# Altium PCB PCB1.PcbDoc
Units mil, origin at the board's own origin, x right, y up, seen from the top; angles counter-clockwise.
Board outline 5120 x 3010 mil, 2 copper layers (Top Layer, Bottom Layer); 50 components, 66 nets, 204 pads, 0 vias.
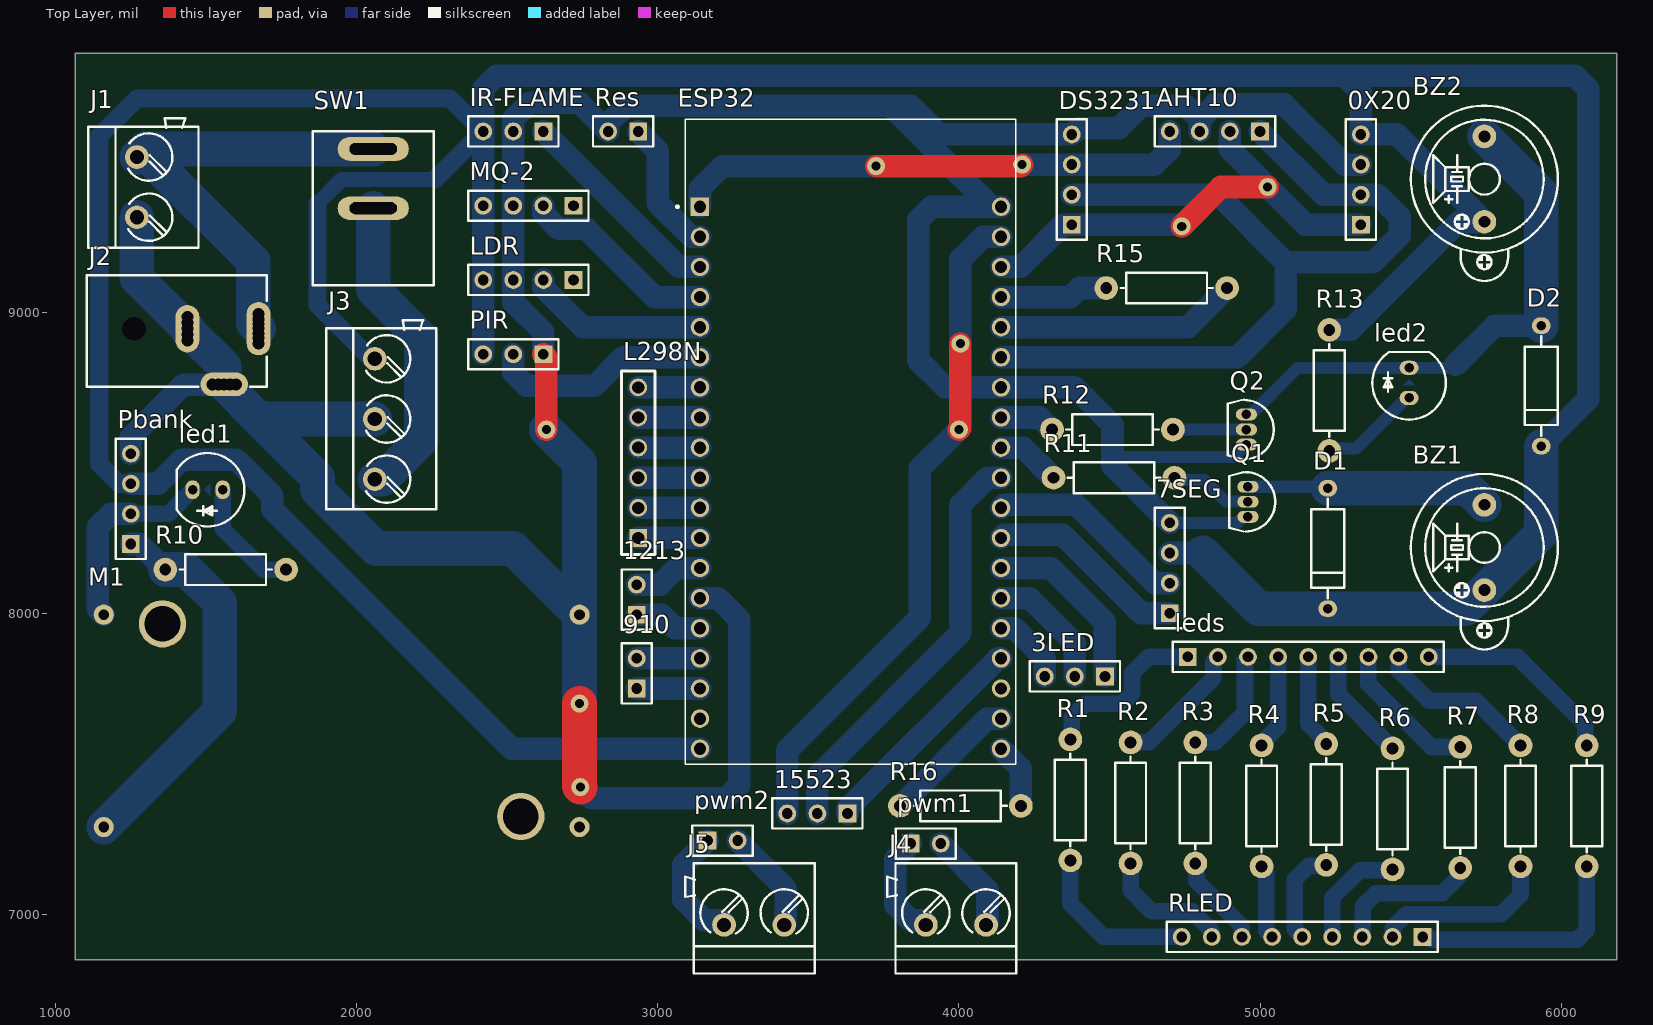
[diagram p0: Top Layer view]
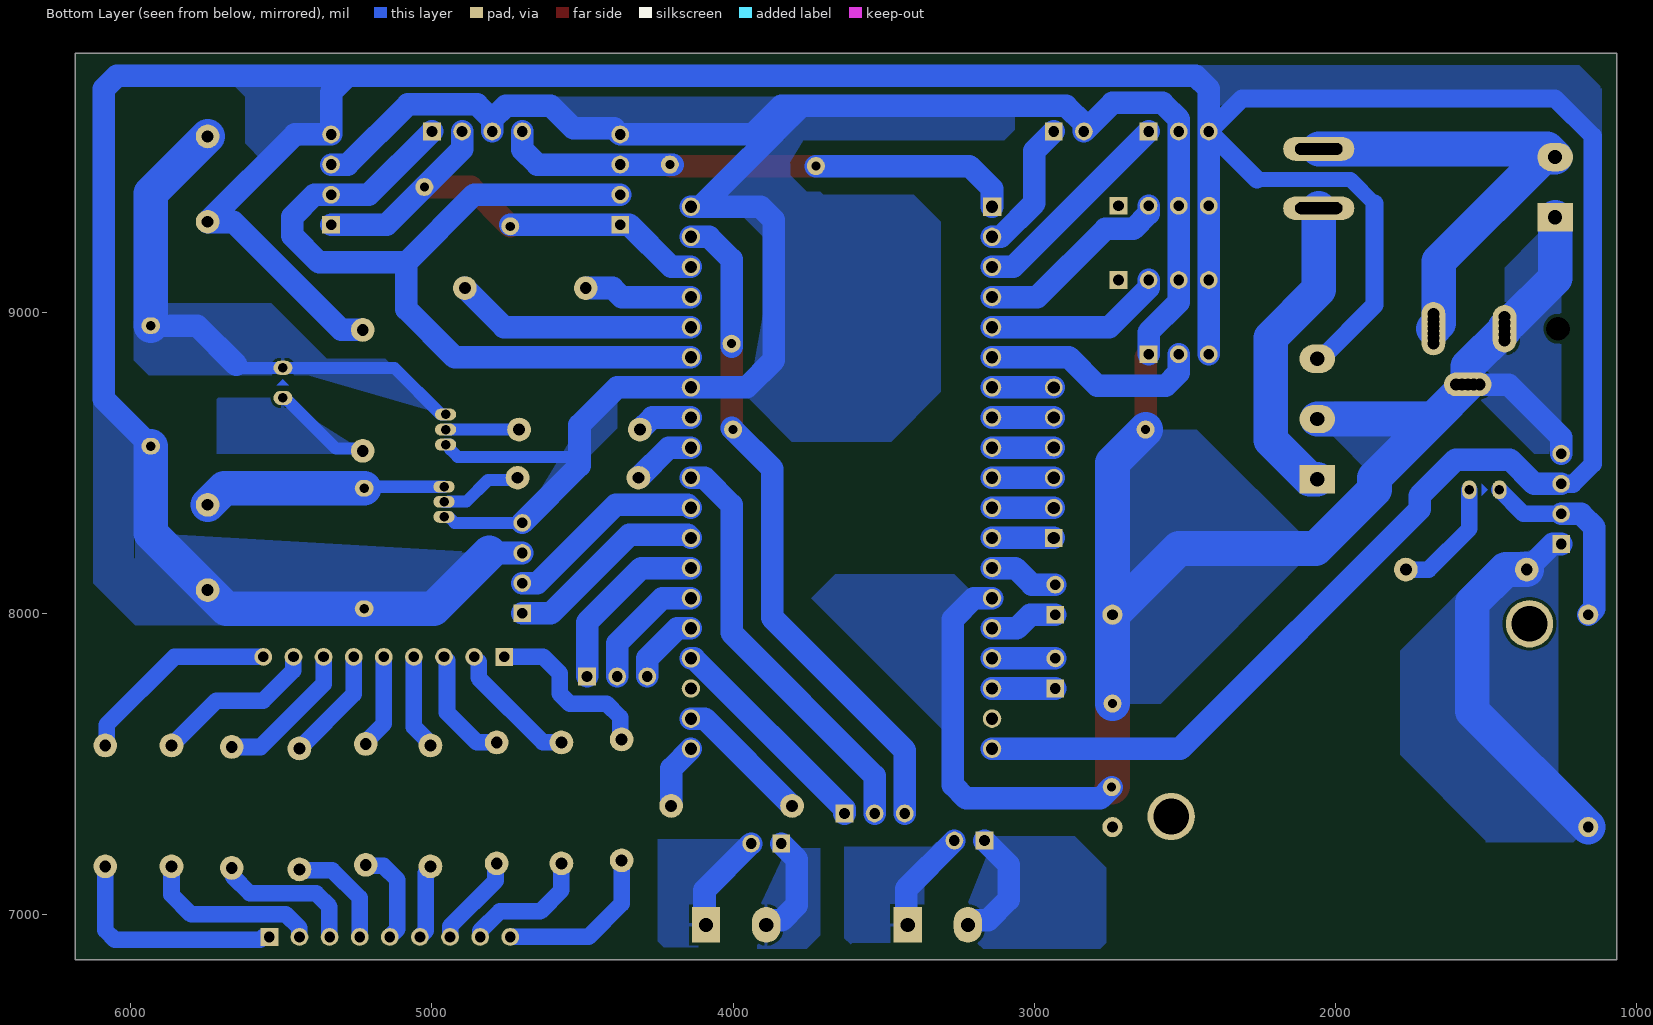
[diagram p1: Bottom Layer view, seen from below]
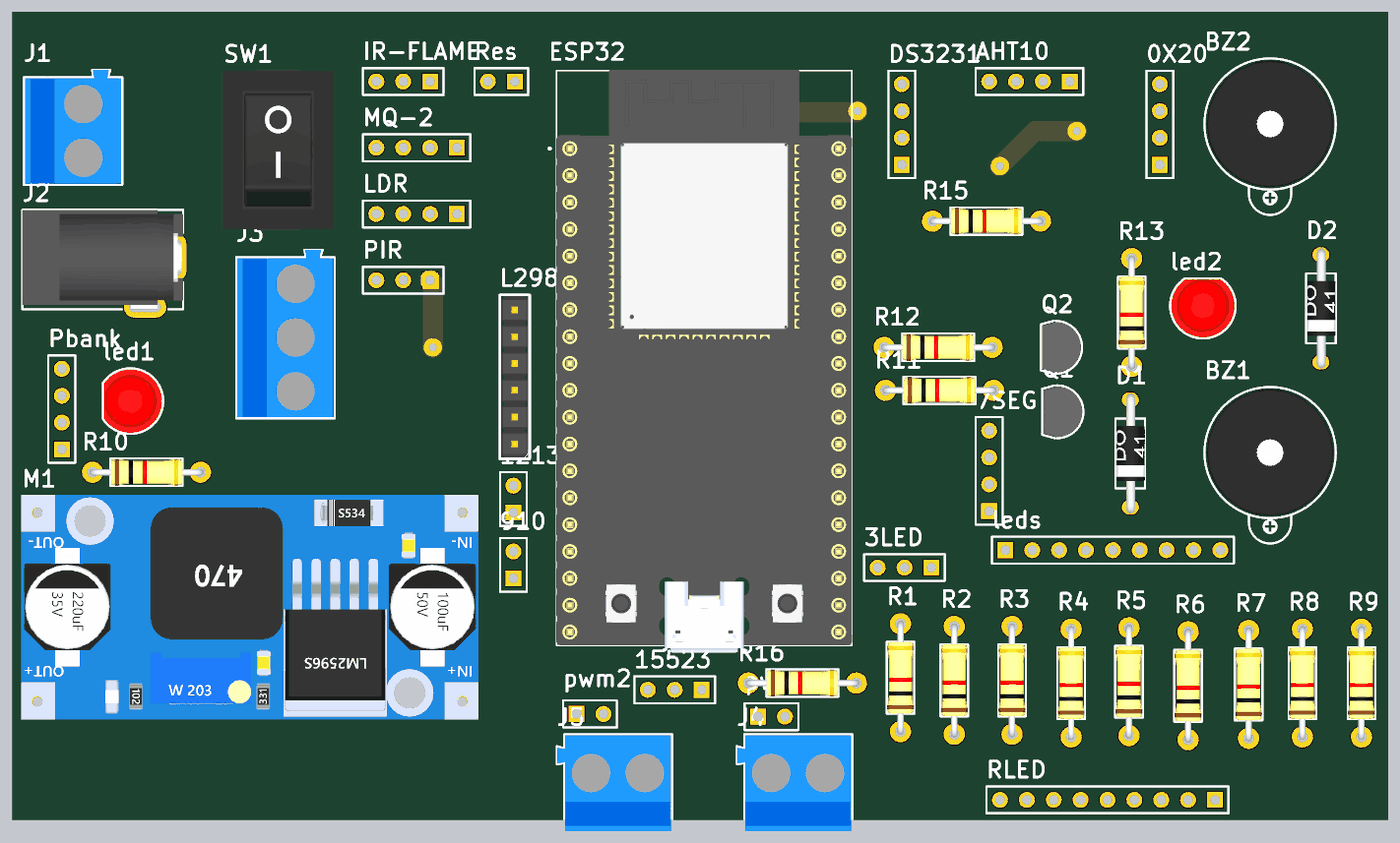
[diagram p2: 3D render of the assembled board from above, using the file's embedded part models]

## Layer stack, top to bottom
Top Solder: solder mask 0.4, Solder Resist, Dk 3.5
Top Layer: signal copper 1.4
Dielectric 1: dielectric 12.6, FR-4, Dk 4.8
Bottom Layer: signal copper 1.4
Bottom Solder: solder mask 0.4, Solder Resist, Dk 3.5

## Board outline
1065,6850 6185,6850 6185,9860 1065,9860

## Design rules (kind name [scope] priority, off if disabled: settings)
Clearance [All] p1: gap=10 ignorepadtopadclearanceinfootprint=FALSE
PolygonConnect [All] p1: connectstyle=Relief reliefconductorwidth=10 reliefentries=4 polygonreliefangle="90 Angle" airgapwidth=10
RoutingVias [All] p1: holewidth=28 width=50 viastyle="Through Hole" minholewidth=28 minwidth=50 maxholewidth=28 maxwidth=50
SolderMaskExpansion [All] p1: expansion=4 istentingtop=FALSE
Width [All] p1: maxlimit=115 minlimit=40 preferedwidth=50
30 further rules are at their usual default settings.

## Components (designator, comment, footprint, x,y, rotation, side; value= is the part's Value field where it differs from the comment)
0X20 "Header 4" HDR1X4 5335,9290 r90 top
3LED "Header 3" HDR1X3 4485,7790 r180 top
7SEG "Header 4" HDR1X4 4700,8000 r90 top
910 "Header 2" HDR1X2 2930,7750 r90 top
1213 "Header 2" HDR1X2 2930,7995 r90 top
15523 "Header 3" HDR1X3 3630,7335 r180 top
AHT10 "Header 4" HDR1X4 5000,9600 r180 top
BZ1 "BUZZER" BZ_C12 5745,8218.27 r90 top
BZ2 "BUZZER" BZ_C12 5745,9441.73 r90 top
D1 "1N4007" D_AX04_DO41 5225,8215 r270 top
D2 "1N4007" D_AX04_DO41 5933.98,8755 r270 top
DS3231 "Header 4" HDR1X4 4375,9290 r90 top
ESP32 "ESP32-DEVKITC-32D" MODULE_ESP32-DEVKITC-32D 3640,8572.05 r0 top
IR-FLAME "Header 3" HDR1X3 2620,9600 r180 top
J1 "CONN_TB2" TBB_2 1270,9415 r90 top
J2 "Power Jack" "Power Jack" 1103.15,8945 r0 top
J3 "CONN_TB3" TBB_3 2060,8645 r90 top
J4 "CONN_TB2" TBB_2 3990,6965 r180 top
J5 "CONN_TB2" TBB_2 3320,6965 r180 top
L298N "CON_PIN_HEADER_6P" CON_6P_header 2935,8250 r90 top
LDR "Header 4" HDR1X4 2720,9106.67 r180 top
led1 "LED5MM_RED" LED5MM_RED 1505,8410 r180 top
led2 "LED5MM_RED" LED5MM_RED 5495,8765 r90 top
leds "Header 9" HDR1X9 4760,7855 r0 top
M1 "LM2596" LM2596 2650,7360 r180 top
MQ-2 "Header 4" HDR1X4 2720,9353.33 r180 top
Pbank "Header 4" HDR1X4 1250,8230 r90 top
PIR "Header 3" HDR1X3 2620,8860 r180 top
pwm1 "Header 2" HDR1X2 3840,7235 r0 top
pwm2 "Header 2" HDR1X2 3165,7245 r0 top
Q1 "BC547" TO92_3 4960,8370 r270 top
Q2 "BC547" TO92_3 4955,8610 r270 top
R1 "220ꭥ" R025W_AX04 4370,7380 r90 top
R2 "220ꭥ" R025W_AX04 4570,7370 r90 top
R3 "220ꭥ" R025W_AX04 4785,7370 r90 top
R4 "220ꭥ" R025W_AX04 5005,7360 r90 top
R5 "220ꭥ" R025W_AX04 5220,7365 r90 top
R6 "220ꭥ" R025W_AX04 5440,7350 r90 top
R7 "220ꭥ" R025W_AX04 5665,7355 r90 top
R8 "220ꭥ" R025W_AX04 5865,7360 r90 top
R9 "220ꭥ" R025W_AX04 6085,7360 r90 top
R10 "220ꭥ" R025W_AX04 1565,8145 r0 top
R11 "220ꭥ" R025W_AX04 4515,8450 r0 top
R12 "220ꭥ" R025W_AX04 4510,8610 r0 top
R13 "220ꭥ" R025W_AX04 5230,8740 r90 top
R15 "10Kꭥ" R025W_AX04 4690,9080 r0 top
R16 "10Kꭥ" R025W_AX04 4005,7360 r0 top
Res "Header 2" HDR1X2 2935,9600 r180 top
RLED "Header 9" HDR1X9 5540,6925 r180 top
SW1 "ToggleSwitch" SWRCK_SPST_S_15X10 2055,9345 r270 top

## Footprints (in the part's own frame and the unit in brackets; to place one, negate y for a bottom-side part, rotate by r counter-clockwise, add the part's x,y. Pads: shape width x height; smd on the part's side, far side on the other; paste and mask are expansions set on the pad)
BZ_C12 [mm] "BUZZER 12mm DIA, 8.5mm Height , 7.62mm pitch"
  round 2 hole 1: 1(-3.6,0) 2(3.6,0)
  silkscreen extent -8.6,-6.2 6.2,6.2, body extent -6,-6 6,6, height 9.5
CON_6P_header [mm] "CON_6P_header male / 2.54mm pitch"
  rect 1.5x1.5 hole 1.02: 1(0,0)
  round 1.5 hole 1.02: 2(2.54,0) 3(5.08,0) 4(7.62,0) 5(10.16,0) 6(12.7,0)
  silkscreen extent -1.4,-1.4 14.1,1.4, body extent -1.27,-1.27 13.97,1.27, height 9.5
D_AX04_DO41 [mm] "DIODE 0.4 INCH SPACING DO-41"
  oval 1.4x1.6 hole 0.8: 1(-5.08,0) 2(5.08,0)
  silkscreen extent -4.2,-1.4 4.2,1.4, body extent -5.68,-1.32 5.68,1.4, height 2.85
HDR1X2 [mm]
  rect 1.5x1.5 hole 0.9: 1(0,0)
  round 1.5 hole 0.9: 2(2.54,0)
  silkscreen extent -1.27,-1.27 3.81,1.27
HDR1X3 [mm] "Connector; Header; 3 Position"
  rect 1.5x1.5 hole 0.9: 1(0,0)
  round 1.5 hole 0.9: 2(2.54,0) 3(5.08,0)
  silkscreen extent -1.27,-1.27 6.35,1.27
HDR1X4 [mm] "Connector; Header; 4 Position"
  rect 1.5x1.5 hole 0.9: 1(0,0)
  round 1.5 hole 0.9: 2(2.54,0) 3(5.08,0) 4(7.62,0)
  silkscreen extent -1.27,-1.27 8.89,1.27
HDR1X9 [mm] "Connector; Header; 9 Position"
  rect 1.5x1.5 hole 0.9: 1(0,0)
  round 1.5 hole 0.9: 2(2.54,0) 3(5.08,0) 4(7.62,0) 5(10.16,0) 6(12.7,0) 7(15.24,0) 8(17.78,0) 9(20.32,0)
  silkscreen extent -1.27,-1.27 21.59,1.27
LED5MM_RED [mm] "LED THD 5MM RED"
  oval 1.2x1.6 hole 0.8: 1(-1.27,0) 2(1.27,0)
  Bottom Layer region: -0.2,0.5 -0.2,-0.5 0.3,0
  silkscreen extent -3.1,-3.1 2.6,3.1, body extent -3,-3 2.5,3, height 9.14
LM2596 [mm] "Module"
  round 1.7 hole 0.9: 1(-2.286,1.778) 2(-2.286,-16.129) 3(37.846,1.778) 4(37.846,-16.129)
  round 4 hole 3: ""(2.667,0.889) ""(32.893,-15.367)
  body extent -3.81,-17.82 39.39,3.43, height 13.35
MODULE_ESP32-DEVKITC-32D [mm]
  rect 1.56x1.56 / inner round 1.56 / far side rect 1.56x1.56 hole 1.04: J2-1(-12.7,19.76)
  round 1.56 hole 1.04: J2-2(-12.7,17.22) J2-3(-12.7,14.68) J2-4(-12.7,12.14) J2-5(-12.7,9.6) J2-6(-12.7,7.06) J2-7(-12.7,4.52) J2-8(-12.7,1.98) J2-9(-12.7,-0.56) J2-10(-12.7,-3.1) J2-11(-12.7,-5.64) J2-12(-12.7,-8.18) J2-13(-12.7,-10.72) J2-14(-12.7,-13.26) J2-15(-12.7,-15.8) J2-16(-12.7,-18.34) J2-17(-12.7,-20.88) J2-18(-12.7,-23.42) J2-19(-12.7,-25.96) J3-1(12.7,19.76) J3-2(12.7,17.22) J3-3(12.7,14.68) J3-4(12.7,12.14) J3-5(12.7,9.6) J3-6(12.7,7.06) J3-7(12.7,4.52) J3-8(12.7,1.98) J3-9(12.7,-0.56) J3-10(12.7,-3.1) J3-11(12.7,-5.64) J3-12(12.7,-8.18) J3-13(12.7,-10.72) J3-14(12.7,-13.26) J3-15(12.7,-15.8) J3-16(12.7,-18.34) J3-17(12.7,-20.88) J3-18(12.7,-23.42) J3-19(12.7,-25.96)
  silkscreen extent -14.7,-27.25 13.95,27.15, body extent -13.97,-27.9 13.97,27.2, height 6.69
"Power Jack" [mm] "Power Adaptor Jack"
  round 1.5 hole 1: 1(14.5,-1.25) 1(14.5,-0.8) 1(14.5,-0.4) 1(14.5,0.4) 1(14.5,0.8) 1(14.5,1.25) 2(8.5,-1) 2(8.5,1) 2(8.5,-0.5) 2(8.5,0.5) 3(10.6,-4.7) 3(11.1,-4.7) 3(12.1,-4.7) 3(12.6,-4.7)
  oval 2x4.5 hole 1: 1(14.5,0)
  oval 2x4 hole 1: 2(8.5,0)
  oval 4x2 hole 1: 3(11.6,-4.7)
  round 1.9 hole 2: MH(4,0)
  silkscreen extent 0,-4.9 15.2,4.5, body extent 0,-4.9 15.2,4.5, height 11
R025W_AX04 [mm] "RESISTOR 1/4 WATT, AXIAL0.4"
  round 2 hole 1: 1(-5.1,0) 2(5.1,0)
  silkscreen extent -3.9,-1.3 3.9,1.3, body extent -5.38,-1.28 5.38,1.28, height 2.6
SWRCK_SPST_S_15X10 [mm] "SWITCH Rocker, SPST, Straight, 15x10"
  oval 2x6 hole 1 slot 4 at 90 deg: 1(-5,0) 2(0,0)
  silkscreen extent -6.5,-5.1 6.5,5.1, body extent -7.6,-5.25 7.6,5.25, height 13.1
TBB_2 [mm] "Terminal Block Blue"
  round 2 / inner round 2 / far side rect 2.4x3 hole 1.2: 1(-2.54,0)
  round 2 / inner round 2 / far side oval 2.4x3 hole 1.2: 2(2.54,0)
  silkscreen extent -5.1,-5.2 5.8,4.1, body extent -4.96,-5.08 5.78,3.99, height 12.52
TBB_3 [mm] "Terminal Block Blue"
  round 2 / inner round 2 / far side rect 2.4x3 hole 1.2: 1(-5.08,0)
  round 2 / inner round 2 / far side oval 2.4x3 hole 1.2: 2(0,0) 3(5.08,0)
  silkscreen extent -7.6,-5.2 8.34,4.1, body extent -7.49,-5.07 8.33,4, height 12.78
TO92_3 [mm] "TO-92, SOT54"
  oval 1x1.8 hole 0.8 mask+0.1: 1(-1.27,0) 2(0,0) 3(1.27,0)
  silkscreen extent -2.5,-1.59 2.5,2.3, body extent -2.38,-1.45 2.38,2.18, height 7.82

## Part data
0X20 7SEG AHT10 DS3231 LDR MQ-2 Pbank: "Header, 4-Pin", LatestRevisionDate=17-Jul-2002, LatestRevisionNote="Re-released for DXP Platform.", Publisher="Altium Limited"
3LED 15523 IR-FLAME PIR: "Header, 3-Pin", LatestRevisionDate=17-Jul-2002, LatestRevisionNote="Re-released for DXP Platform.", Publisher="Altium Limited"
910 1213 pwm1 pwm2 Res: "Header, 2-Pin", LatestRevisionDate=17-Jul-2002, LatestRevisionNote="Re-released for DXP Platform.", Publisher="Altium Limited"
BZ1 BZ2: library part BUZZER_C12, "Buzzer, 12X8.5mm, Magnetic Transducer", MANF="Buerklin, CUI", MANF_P#="CM12P, MT03-H1BHP, BMT1205XH7.5, CEM-1201(50)", PARAM="2048 ±200 Hz", PARAM2=3~7VCC, PRICE=PRICE
D1 D2: library part DIODE_THD_1N4007, "DIODE, GENERAL PURPOSE, 1000V/1A", ASSEMBLY=ASSEMBLY, DESC=DESCRIPTION, MANF=Diodes, MANF_P#=1N4007, PARAM="1000V, 1.15V", PARAM2=1.5A, PRICE=PRICE
ESP32: "WiFi Development Tools (802.11) ESP32 General Development Kit, ESP32-WROOM-32D on the board", Package=None, Check_prices=https://www.snapeda.com/parts/ESP32-DEVKITC-32D/Espressif+Systems/view-part/?ref=eda, MF="Espressif Systems", MP=ESP32-DEVKITC-32D, SnapEDA_Link=https://www.snapeda.com/parts/ESP32-DEVKITC-32D/Espressif+Systems/view-part/?ref=snap
J1 J3 J4 J5: "CONN, TERMINAL BLOCK, 5.08mm pitch"
L298N: "6-pin header 2.54mm pitch male", JLCPCB Part Numer=C492405, Manufacturer=XFCN, Manufacturer Part Number=PZ254V-11-06P
led1 led2: library part LED_THD_5MM_RED, "LED, THD, 5MM, RED", ASSEMBLY=ASSEMBLY, DESC=DESCRIPTION, MANF=MANF, MANF_P#=MANF_PART#, PARAM2=2.2V, PRICE=PRICE
leds RLED: "Header, 9-Pin", LatestRevisionDate=17-Jul-2002, LatestRevisionNote="Re-released for DXP Platform.", Publisher="Altium Limited"
M1: "Module"
Q1 Q2: library part NPN_BC547_TO92, "BJT, NPN, 45v, 0.1A, THD, TO92", MANF=FAIRCHILD, MANF_P#=BC547, PARAM="0.1A, Hfe110~800", PARAM2="45v, 500mW"
R1 R2 R3 R4 R5 R6 R7 R8 R9 R10 R11 R12 R13 R15 R16: library part RES_THD, "RESISTOR, THD", ASSEMBLY=ASSEMBLY, DESC=DESCRIPTION, DIST#=MOUSER, MANF="KOA SPEER", MANF_P#=RK73H1ETTP4701F, PARAM=0.063W, PARAM2=1%, PRICE="100= 0.5$"
SW1: library part SWROK_SPST_R_15X10, "SWITCH, Rocker, SPST, THD, 15x10.5mm", ASSEMBLY=ASSEMBLY, DESC=DESCRIPTION, MANF=-, MANF_PART#=-, PARAM=-, PRICE=-
J2: Adding Date=10/21/2009, Company=Personal, Designer="Saeid Jorablo", Project Name=Laser

## Free pads (board coordinates)
  round 60 hole 30: 2(2630,8610) 5(2742.5,7422.5) 7(2740,7700) 9(3725,9485) 10(4210,9490) 11(4740,9285) 12(5025.43,9415.43) 13(4000,8610) 14(4005,8895)

## Nets (pads, with @x,y where several pads share a name; then routed paths per layer and width w, separated by ;. In a path a pad name is that pad's centre, name@x,y a point inside that pad or via, vN(x,y) a via of type N, cw(c..) or ccw(c..) an arc to the next point about the centre after c; other vN are vias at no path point)
3.3V: AHT10.4 DS3231.3 ESP32.J2-1 pad.9 pad.10 | length 1743.8
  Top Layer w75: pad.9 4205,9485 pad.10
  Bottom Layer w75: ESP32.J2-1 3140,9410 3215,9485 pad.9 ; pad.10@4200,9490 pad.10 4650,9490 4700,9540 AHT10.4
5: 15523.2 ESP32.J3-10 | length 1394
  Bottom Layer w75: 15523.2 3530,7460 4005,7935 4005,8360 4095,8450 ESP32.J3-10
5V: 0X20.4 7SEG.3 BZ1.1 BZ2.1 D1.2 D2.2 ESP32.J2-19 IR-FLAME.3 J3.3 LDR.4 MQ-2.4 Pbank.3 PIR.3 R13.2 | length 15145.1
  Bottom Layer w50: 1870,9360 1950,9440 2260,9440
  Bottom Layer w60: Pbank.3 1210,8430 1145,8495 1145,9585 1270,9710 2310,9710 IR-FLAME.3 2260,9440 ; 1870,9360 1870,9023.19 2048.19,8845 J3.3
  Bottom Layer w75: Pbank.3 1340,8430 1420,8510 1600,8510 1720,8390 1720,8345 2515,7550 ESP32.J2-19 ; PIR.3 LDR.4 MQ-2.4 IR-FLAME.3 2420,9741.07 2463.93,9785 5280,9785 ; 7SEG.3 4810,8200 ; R13.2 5300.79,8940.79 5659.28,9299.28 5744.28,9299.28 BZ2.1 5455,9590 0X20.4 5335,9730 5280,9785 ; D2.2 6090,8711.02 6090,9741.07 6046.07,9785 5280,9785
  Bottom Layer w115: 4810,8200 4995,8015 D1.2 5683.46,8015 BZ1.1 5933.98,8265.51 D2.2
15: 15523.1 ESP32.J3-16 | length 732.5
  Bottom Layer w75: 15523.1 3630,7350.6 4129.4,7850 ESP32.J3-16
16: 7SEG.1 ESP32.J3-12 | length 671.8
  Bottom Layer w75: ESP32.J3-12 4150,8260 4345,8260 4605,8000 7SEG.1
17: 7SEG.2 ESP32.J3-11 | length 671.8
  Bottom Layer w75: ESP32.J3-11 4150,8360 4390,8360 4650,8100 7SEG.2
18: ESP32.J3-9 R11.1 | length 215.6
  Bottom Layer w75: ESP32.J3-9 4213.2,8550 4313.2,8450 R11.1
19: ESP32.J3-8 R12.1 | length 185.8
  Bottom Layer w75: ESP32.J3-8 4268.2,8650 4308.2,8610 R12.1
23: 15523.3 ESP32.J3-2 pad.13 pad.14 | length 2261.3
  Top Layer w75: pad.13 4005,8615 pad.14
  Bottom Layer w75: 15523.3 3430,7545 3870,7985 3870,8480 pad.13 pad.13@4005,8615 ; pad.14@4005,8885 pad.14 4005,9175 4080,9250 ESP32.J3-2
34: ESP32.J2-5 LDR.2 | length 600.3
  Bottom Layer w75: LDR.2 2620,9080.44 2750.44,8950 ESP32.J2-5
35: ESP32.J2-6 PIR.2 | length 738.6
  Bottom Layer w75: PIR.2 2520,8798.93 2563.93,8755 2790,8755 2885,8850 ESP32.J2-6
GND: 0X20.3 7SEG.4 AHT10.3 DS3231.4 ESP32.J2-14 ESP32.J3-1 ESP32.J3-7 IR-FLAME.2 J1.1 J2.2 J2.3 J3.2 LDR.3 M1.2 MQ-2.3 pad.2 pad.5 pad.7 Pbank.4 PIR.1 Q1.3 Q2.3 Res.2 | length 12963.6
  Top Layer w75: PIR.1 2630,8850 pad.2
  Top Layer w115: pad.7 2740,7425 pad.5
  Bottom Layer w40: 4510,8490 4539.37,8519.37 4914.37,8519.37 4939.57,8544.57 4939.57,8559.69 4939.88,8560 Q2.3 ; 7SEG.4 4924.88,8300 4944.88,8320 Q1.3
  Bottom Layer w75: Pbank.4 1250,8585 1424.24,8759.25 1519.76,8759.25 1520.47,8759.96 1540.16,8759.96 1559.84,8759.96 1579.53,8759.96 J2.3@1599.21,8759.96 ; PIR.1 2620,8933.33 2520,9033.33 LDR.3 MQ-2.3 IR-FLAME.2 2520,9641.07 2573.93,9695 2740,9695 Res.2 2835,9626.23 2893.77,9685 3772.6,9685 ; pad.5 2780,7385 3226.07,7385 3270,7428.93 3270,7980 3200,8050 ESP32.J2-14 ; 7SEG.4 4510,8490 4510,8625 4385,8750 ESP32.J3-7 3955,8750 3865,8840 3865,9306.07 3908.93,9350 ESP32.J3-1 4107.6,9350 3772.6,9685 ; AHT10.3 4800,9640 ; 0X20.3 5280,9490 5080,9690 4850,9690 4800,9640 ; 3772.6,9685 3840,9685 3935,9590 DS3231.4 4395,9610 4530,9610 4605,9685 4755,9685 4800,9640
  Bottom Layer w115: J1.1 1270,9112.8 1416.55,8966.24 1419.67,8966.24 1437.8,8948.11 1437.8,8945 1437.8,8941.89 1559.84,8819.84 1559.84,8759.96 1674.8,8645 ; J3.2 1674.8,8645 ; pad.2 2740,8500 M1.2 ; pad.7 M1.2 ; 1674.8,8645 1869.9,8449.9 1869.9,8410.1 2065,8215 2520,8215 M1.2
Net3LED_1: 3LED.1 ESP32.J3-13 | length 599.6
  Bottom Layer w75: ESP32.J3-13 4305,8150 4485,7970 3LED.1
Net3LED_2: 3LED.2 ESP32.J3-14 | length 417.1
  Bottom Layer w75: ESP32.J3-14 4235,8050 4385,7900 3LED.2
Net3LED_3: 3LED.3 ESP32.J3-15 | length 246.4
  Bottom Layer w75: ESP32.J3-15 4185,7950 4285,7850 3LED.3
Net910_1: 910.1 ESP32.J2-17 | length 210
  Bottom Layer w75: 910.1 ESP32.J2-17
Net910_2: 910.2 ESP32.J2-16 | length 210
  Bottom Layer w75: 910.2 ESP32.J2-16
Net1213_1: 1213.1 ESP32.J2-15 | length 228.6
  Bottom Layer w75: 1213.1 3012.5,7995 3057.5,7950 ESP32.J2-15
Net1213_2: 1213.2 ESP32.J2-13 | length 232.8
  Bottom Layer w75: 1213.2 3007.5,8095 3062.5,8150 ESP32.J2-13
NetBZ1_2: BZ1.2 D1.1 Q1.1 | length 809.9
  Bottom Layer w40: Q1.1 5211.97,8420 5216.97,8415 D1.1
  Bottom Layer w115: D1.1 5690,8415 BZ1.2
NetBZ2_2: BZ2.2 D2.1 led2.2 Q2.1 | length 1807.9
  Bottom Layer w40: Q2.1 4970.12,8660 5125.12,8815 led2.2 5640,8815 5650,8825
  Bottom Layer w75: 5650,8825 5780,8955 D2.1
  Bottom Layer w115: BZ2.2 5933.98,9394.49 D2.1
NetESP32_J2-2: ESP32.J2-2 Res.1 | length 451.7
  Bottom Layer w75: Res.1 3000,9535 3000,9361.41 3111.41,9250 ESP32.J2-2
NetESP32_J2-3: ESP32.J2-3 IR-FLAME.1 | length 706.4
  Bottom Layer w75: IR-FLAME.1 3070,9150 ESP32.J2-3
NetESP32_J2-4: ESP32.J2-4 MQ-2.2 | length 661
  Bottom Layer w75: MQ-2.2 2620,9327.1 2670.8,9276.31 2763.69,9276.31 2990,9050 ESP32.J2-4
NetESP32_J2-7: ESP32.J2-7 L298N.6 | length 205
  Bottom Layer w75: L298N.6 ESP32.J2-7
NetESP32_J2-8: ESP32.J2-8 L298N.5 | length 205
  Bottom Layer w75: L298N.5 ESP32.J2-8
NetESP32_J2-9: ESP32.J2-9 L298N.4 | length 205
  Bottom Layer w75: L298N.4 ESP32.J2-9
NetESP32_J2-10: ESP32.J2-10 L298N.3 | length 205
  Bottom Layer w75: L298N.3 ESP32.J2-10
NetESP32_J2-11: ESP32.J2-11 L298N.2 | length 205
  Bottom Layer w75: L298N.2 ESP32.J2-11
NetESP32_J2-12: ESP32.J2-12 L298N.1 | length 205
  Bottom Layer w75: L298N.1 ESP32.J2-12
NetESP32_J3-4: ESP32.J3-4 R15.1 | length 361.6
  Bottom Layer w75: ESP32.J3-4 4370,9050 4400,9080 R15.1
NetESP32_J3-5: ESP32.J3-5 R15.2 | length 804.6
  Bottom Layer w75: ESP32.J3-5 4760.79,8950 R15.2
NetESP32_J3-18: ESP32.J3-18 R16.1 | length 455.9
  Bottom Layer w75: R16.1 4094.21,7650 ESP32.J3-18
NetESP32_J3-19: ESP32.J3-19 R16.2 | length 217.3
  Bottom Layer w75: ESP32.J3-19 4205.07,7484.93 4205.07,7360.72 R16.2
NetJ1_2: J1.2 J2.1 SW1.1 | length 1556.9
  Bottom Layer w115: J2.1@1674.02,8945 1655.89,8963.13 1655.89,9169.11 1310,9515 J1.2 1296.85,9541.85 SW1.1
NetJ3_1: J3.1 SW1.2 | length 1045.1
  Bottom Layer w115: SW1.2 2055,9075 2215,8915 2215,8575 2085,8445 J3.1
NetJ4_1: J4.1 pwm1.2 | length 336.3
  Bottom Layer w75: pwm1.2 4095,7080 4095,6970 J4.1
NetJ4_2: J4.2 pwm1.1 | length 358.3
  Bottom Layer w75: pwm1.1 3788.49,7183.49 3788.49,7030.49 3838.44,6980.54 3881,6980.54 3890,6971.54 J4.2
NetJ5_1: J5.1 pwm2.2 | length 348.3
  Bottom Layer w75: pwm2.2 3425,7085 3425,6970 J5.1
NetJ5_2: J5.2 pwm2.1 | length 402.8
  Bottom Layer w75: pwm2.1 3085,7165 3085,7048.93 3153.39,6980.54 3211,6980.54 3220,6971.54 J5.2
Netled1_1: led1.1 R10.2 | length 396.7
  Bottom Layer w55: led1.1 1555,8280 1690,8145 R10.2
Netled1_2: led1.2 M1.4 Pbank.2 | length 664.7
  Bottom Layer w55: Pbank.2@1251.1,8330 1375.12,8330 1455,8409.88 led1.2
  Bottom Layer w75: M1.4 1140,8015 1140,8286.07 1183.93,8330 Pbank.2
Netled2_1: led2.1 R13.1 | length 337.8
  Bottom Layer w40: R13.1 5237.41,8546.63 5318.75,8546.63 5487.13,8715 led2.1
Netleds_1: leds.1 R1.2 | length 583.8
  Bottom Layer w55: R1.2 4374.54,7585.33 4374.54,7654.54 4420,7700 4542.78,7700 4575,7732.22 4575,7800 4630,7855 leds.1
Netleds_2: leds.2 R2.2 | length 439.9
  Bottom Layer w55: R2.2 4570.78,7571.57 4631.57,7571.57 4845,7785 4845,7838.9 4860,7853.9 leds.2
Netleds_3: leds.3 R3.2 | length 395.2
  Bottom Layer w55: R3.2 4850.79,7570.79 4950,7670 4950,7843.9 4960,7853.9 leds.3
Netleds_4: leds.4 R4.2 | length 317
  Bottom Layer w55: R4.2 5005,7567.21 5060,7622.21 leds.4
Netleds_5: leds.5 R5.2 | length 314.1
  Bottom Layer w55: leds.5 5160,7632.21 5220,7572.21 R5.2
Netleds_6: leds.6 R6.2 | length 379.8
  Bottom Layer w55: leds.6 5260,7730.79 R6.2
  Bottom Layer w75: R6.2 R6.2@5440,7551.8
Netleds_7: leds.7 R7.2 | length 481.7
  Bottom Layer w55: leds.7 5360,7765 5569.21,7555.79 R7.2
Netleds_8: leds.8 R8.2 | length 553.2
  Bottom Layer w55: leds.8 5460.78,7854.22 5460.78,7809.22 5560.22,7709.78 5716.01,7709.78 R8.2
Netleds_9: leds.9 R9.2 | length 684.5
  Bottom Layer w55: leds.9 5855,7855 6080.46,7629.54 6080.46,7565.33 R9.2
NetM1_3: M1.3 Pbank.1 R10.1 | length 1279.8
  Bottom Layer w75: Pbank.1 1278.2,8230 1363.2,8145 R10.1
  Bottom Layer w115: M1.3 1545,7675 1545,8034.21 1434.21,8145 R10.1
NetQ1_2: Q1.2 R11.2 | length 277.3
  Bottom Layer w40: R11.2 4723.2,8442.59 4813.68,8442.59 4885.96,8370.31 4944.57,8370.31 4944.88,8370 Q1.2
NetQ2_2: Q2.2 R12.2 | length 244.2
  Bottom Layer w40: R12.2 Q2.2
NetR1_1: R1.1 RLED.9 | length 559.8
  Bottom Layer w55: R1.1 4370,7035 4480,6925 RLED.9
NetR2_1: R2.1 RLED.8 | length 435.1
  Bottom Layer w55: R2.1 4570,7080 4640,7010 4775,7010 4839.22,6945.78 4839.22,6925.78 RLED.8
NetR3_1: R3.1 RLED.7 | length 308.4
  Bottom Layer w55: R3.1 4789.07,7165.14 4789.07,7110.93 4939.22,6960.78 4939.22,6925.78 RLED.7
NetR4_1: R4.1 RLED.6 | length 248.7
  Bottom Layer w55: R4.1 5005,7152.79 5020,7137.79 5020,6946.1 5040,6926.1 RLED.6
NetR5_1: R5.1 RLED.5 | length 325.7
  Bottom Layer w55: RLED.5 5140,6926.1 5115,6951.1 5115,7115 5160.93,7160.93 5216.72,7160.93 R5.1
NetR6_1: R6.1 RLED.4 | length 369
  Bottom Layer w55: RLED.4 5240,7055 5330.93,7145.93 5436.72,7145.93 R6.1
NetR7_1: R7.1 RLED.3 | length 492.7
  Bottom Layer w55: RLED.3 5340.78,6925.78 5340.78,7025.78 5385,7070 5605,7070 5660.46,7125.46 5660.46,7149.67 R7.1
NetR8_1: R8.1 RLED.2 | length 595.9
  Bottom Layer w55: RLED.2@5440,6926.1 RLED.2 5440.78,6925.78 5440.78,6955.78 5485,7000 5800,7000 5865,7065 R8.1
NetR9_1: R9.1 RLED.1 | length 774.5
  Bottom Layer w55: RLED.1 5542.03,6922.97 5562.19,6922.97 5570.16,6915 6052.78,6915 6085,6947.22 R9.1
SCL: 0X20.1 AHT10.2 DS3231.1 ESP32.J3-3 pad.11 pad.12 | length 1595.5
  Top Layer w75: pad.11 4870.43,9415.43 pad.12
  Bottom Layer w75: ESP32.J3-3 4205,9150 4345,9290 pad.11@4740,9290 ; AHT10.2 4900,9540.86 5150.86,9290 0X20.1
SDA: 0X20.2 AHT10.1 DS3231.2 ESP32.J3-6 | length 3028.9
  Bottom Layer w75: ESP32.J3-6 4925,8850 5085,9010 5085,9165 ; DS3231.2 4860,9390 5085,9165 ; AHT10.1 5210,9390 5390,9390 5463.93,9316.07 5463.93,9253.93 5375,9165 5085,9165
pads on no net: ESP32.J2-18 ESP32.J3-17 J2.MH LDR.1 M1. M1.1 MQ-2.1

## Polygon pours and split planes (outlines as drawn)
NetJ4_1 on Bottom Layer "NETJ4_1_L02_P061" (solid, pour order 61): 3955,7270 3975,7250 4250,7250 4250,6910 4230,6890 4115,6890 4115,7010 3915,7210
NetJ4_2 on Bottom Layer "NETJ4_2_L02_P060" (solid, pour order 60): 3805,7250 3775,7220 3710,7220 3710,6930 3755,6885 3920,6885 3920,7010
NetJ5_1 on Bottom Layer "NETJ5_1_L02_P059" (solid, pour order 59): 3325,7240 3340,7225 3630,7225 3630,6920 3610,6900 3605,6905 3435,6905 3365,6975 3365,7110 3235,7240
NetJ5_2 on Bottom Layer "NETJ5_2_L02_P058" (solid, pour order 58): 3130,7260 2865,7260 2760,7155 2760,6905 2780,6885 3170,6885 3250,6965
GND on Bottom Layer "GND_L02_P057" (solid, pour order 57): 3215,8080 3265,8130 3660,8130 3740,8050 3300,7610 3300,7550
GND on Bottom Layer "GND_L02_P056" (solid, pour order 56): 3700,9390 3400,9390 3310,9300 3310,8735 3475,8570 3805,8570 3950,8715
5V on Bottom Layer "5V_L02_P055" (solid, pour order 55): 1120,9750 1115,9745 1115,9585 1155,9625
5V on Bottom Layer "5V_L02_P054" (solid, pour order 54): 1120,9595 1120,9750 1190,9820
5V on Bottom Layer "5V_L02_P053" (solid, pour order 53): 1325,9820 1360,9820 1370,9810 1365,9805 1365,9740 1320,9740 1290,9710 1270,9730 1240,9730
5V on Bottom Layer "5V_L02_P052" (solid, pour order 52): 1120,9595 1140,9615 1140,9770 1190,9820 1355,9820
GND on Bottom Layer "GND_L02_P051" (solid, pour order 51): 3700,8825 3840,8825 3840,8815 3940,8715
GND on Bottom Layer "GND_L02_P050" (solid, pour order 50): 3817.5,9500 3810,9492.5 3810,9315 3835,9315 3870,9350
GND on Bottom Layer "GND_L02_P048" (solid, pour order 48): 3765,9575 3790,9575 3845,9520 3825,9500 3810,9500
GND on Bottom Layer "GND_L02_P047" (solid, pour order 47): 3950,8715 3840,8825 3700,8825 3700,9390 3710,9400 3755,9400 3810,9455 3810,9500
GND on Bottom Layer "GND_L02_P043" (solid, pour order 43): 3785,9585 3800,9570 3925,9570 4024.47,9470.53 4024.47,9350 4000,9350 3890,9240
NetM1_3 on Bottom Layer "NETM1_3_L02_P042" (solid, pour order 42): 1255,8220 1260,8215 1260,7390 1160,7290 1210,7240 1500,7240 1500,7245 1785,7530 1785,7875 1465,8195
GND on Bottom Layer "GND_L02_P041" (solid, pour order 41): 3835,9570 3745,9660 3740,9655 3065,9655 3065,9605 3100,9570
GND on Bottom Layer "GND_L02_P040" (solid, pour order 40): 3850,9720 3855,9715 4585,9715 4585,9710 4505,9630 4365,9630 4365,9625 4360,9620 3940,9620
5V on Bottom Layer "5V_L02_P038" (solid, pour order 38): 1255,9735 1270,9735 1355,9820 2450,9820 2450,9755 2380,9685
5V on Bottom Layer "5V_L02_P037" (solid, pour order 37): 5620,9715 5655,9750 5635,9770 5555,9770
5V on Bottom Layer "5V_L02_P036" (solid, pour order 36): 5335,9600 5360,9625 5360,9790 5545,9790 5620,9715 5620,9560 5560,9500
5V on Bottom Layer "5V_L02_P035" (solid, pour order 35): 6020,8215 5975,8170 5975,7960 5985,7960 6010,7985
5V on Bottom Layer "5V_L02_P034" (solid, pour order 34): 6125,8705 6125,8100 5990,7965 5990,8660 6055,8725
5V on Bottom Layer "5V_L02_P033" (solid, pour order 33): 5985,8260 5985,7960 5695,7960 5690,7965
NetBZ2_2 on Bottom Layer "NETBZ2_2_L02_P032" (solid, pour order 32): 5395,8790 5940,8790 5990,8840 5990,8970 5480,8970 5400,8890
Netled2_1 on Bottom Layer "NETLED2_1_L02_P031" (solid, pour order 31): 5505,8715 5710,8715 5715,8710 5715,8530 5239.21,8530 5230,8539.21
NetBZ2_2 on Bottom Layer "NETBZ2_2_L02_P029" (solid, pour order 29): 5334.61,8830.04 5655.04,8830.04 5715,8890
NetBZ2_2 on Bottom Layer "NETBZ2_2_L02_P028" (solid, pour order 28): 5334.61,8830.04 5534.57,9030 5880,9030
NetBZ2_2 on Bottom Layer "NETBZ2_2_L02_P027" (solid, pour order 27): 5325.1,8830.04 5464.99,8830.04 5664.95,9030
NetBZ2_2 on Bottom Layer "NETBZ2_2_L02_P026" (solid, pour order 26): 5453.71,8818.75 5664.95,9030 5965,9030
NetBZ2_2 on Bottom Layer "NETBZ2_2_L02_P025" (solid, pour order 25): 5165,8845 5465,8845 5495,8815
NetBZ2_2 on Bottom Layer "NETBZ2_2_L02_P024" (solid, pour order 24): 5125.12,8815 5155.2,8845.08 5525.08,8845.08
NetBZ2_2 on Bottom Layer "NETBZ2_2_L02_P023" (solid, pour order 23): 5933.98,8955 5707.5,8955 5567.5,8815
NetBZ2_2 on Bottom Layer "NETBZ2_2_L02_P022" (solid, pour order 22): 5495,8815 5635,8955 5933.98,8955
NetBZ2_2 on Bottom Layer "NETBZ2_2_L02_P020" (solid, pour order 20): 4962.56,8660 5117.56,8815 5495,8815
5V on Bottom Layer "5V_L02_P019" (solid, pour order 19): 4816.53,8200 5868.46,8200 5933.98,8265.51
GND on Bottom Layer "GND_L02_P018" (solid, pour order 18): 4700,8310 4510,8500 4510,8625
GND on Bottom Layer "GND_L02_P016" (solid, pour order 16): 4385,8750 4385,8615 4700,8300
no net on Bottom Layer "NONET_L02_P015" (solid, pour order 15): 4510,8625 4510,8490
no net on Bottom Layer "NONET_L02_P014" (solid, pour order 14): 4510,8625 4510,8490
5V on Bottom Layer "5V_L02_P013" (solid, pour order 13): 6124.87,8745.89 5933.98,8555 5933.98,8200.81
5V on Bottom Layer "5V_L02_P012" (solid, pour order 12): 4810,8200 5868.46,8200 5683.46,8015 4995,8015
GND on Bottom Layer "GND_L02_P011" (solid, pour order 11): 2630,8610 2740,8500 2740,7700 2580,7700 2065,8215 2460,8610
GND on Bottom Layer "GND_L02_P010" (solid, pour order 10): 1436.32,8940.7 1554.92,8822.1 1554.92,8757.46 1477.46,8757.46 1252.71,8532.71
GND on Bottom Layer "GND_L02_P005" (solid, pour order 5): 1250,8530 1250,9295 1270,9315 1437.8,9147.2 1437.8,8891.85 1569.68,8759.96 1339.72,8530
GND on Bottom Layer "GND_L02_P009" (solid, pour order 9): 1550,8759.96 1479.96,8759.96 1437.8,8717.8 1437.8,8877.01 1559.84,8754.96
GND on Bottom Layer "GND_L02_P008" (solid, pour order 8): 1432.8,8940 1559.84,8812.95 1559.84,8754.96 1474.96,8754.96 1437.8,8717.8 1437.8,8943.44
GND on Bottom Layer "GND_L02_P006" (solid, pour order 6): 2060,8645 2060,8640 1869.9,8449.9 1617.32,8702.48 2002.52,8702.48